# Altium PCB PCB1.PcbDoc
Units mm, origin at the board's own origin, x right, y up, seen from the top; angles counter-clockwise.
Board outline 45 x 31 mm, 2 copper layers (Top Layer, Bottom Layer); 47 components, 32 nets, 208 pads, 24 vias.
Unrouted connection lines stored in the file: 16.
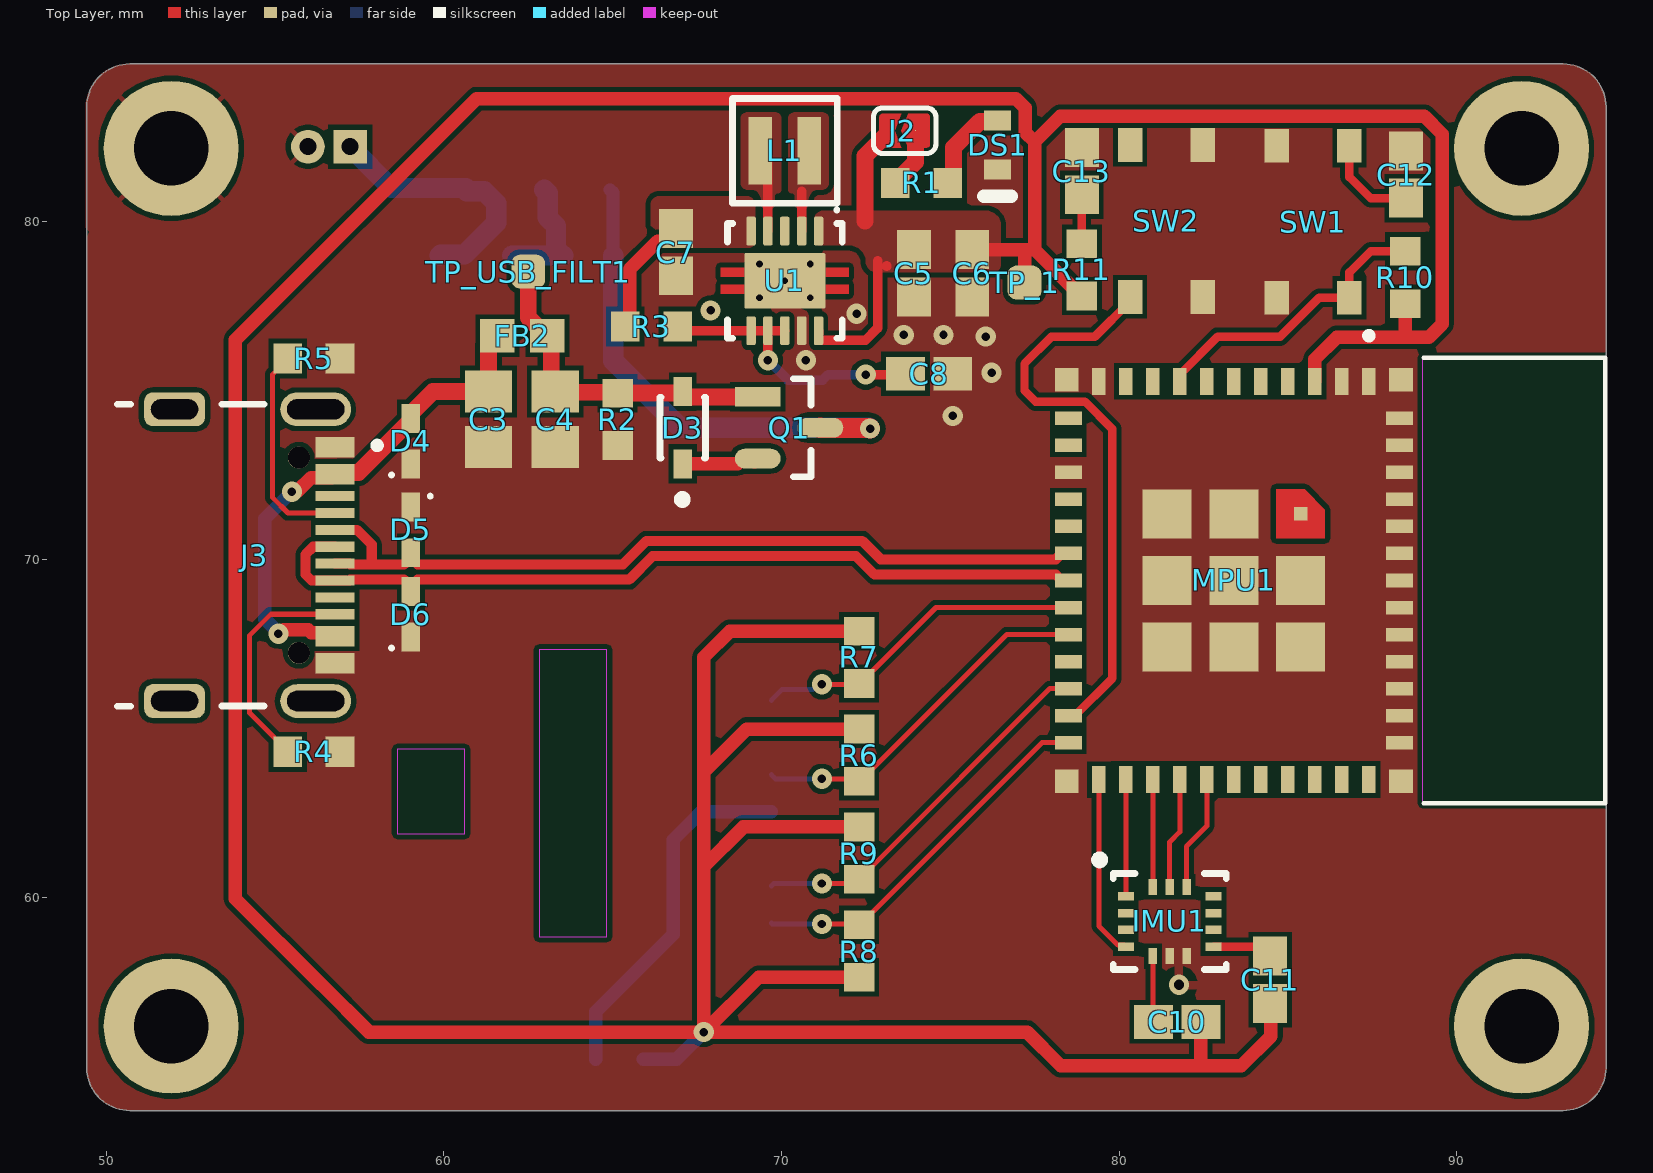
[diagram p0: Top Layer view]
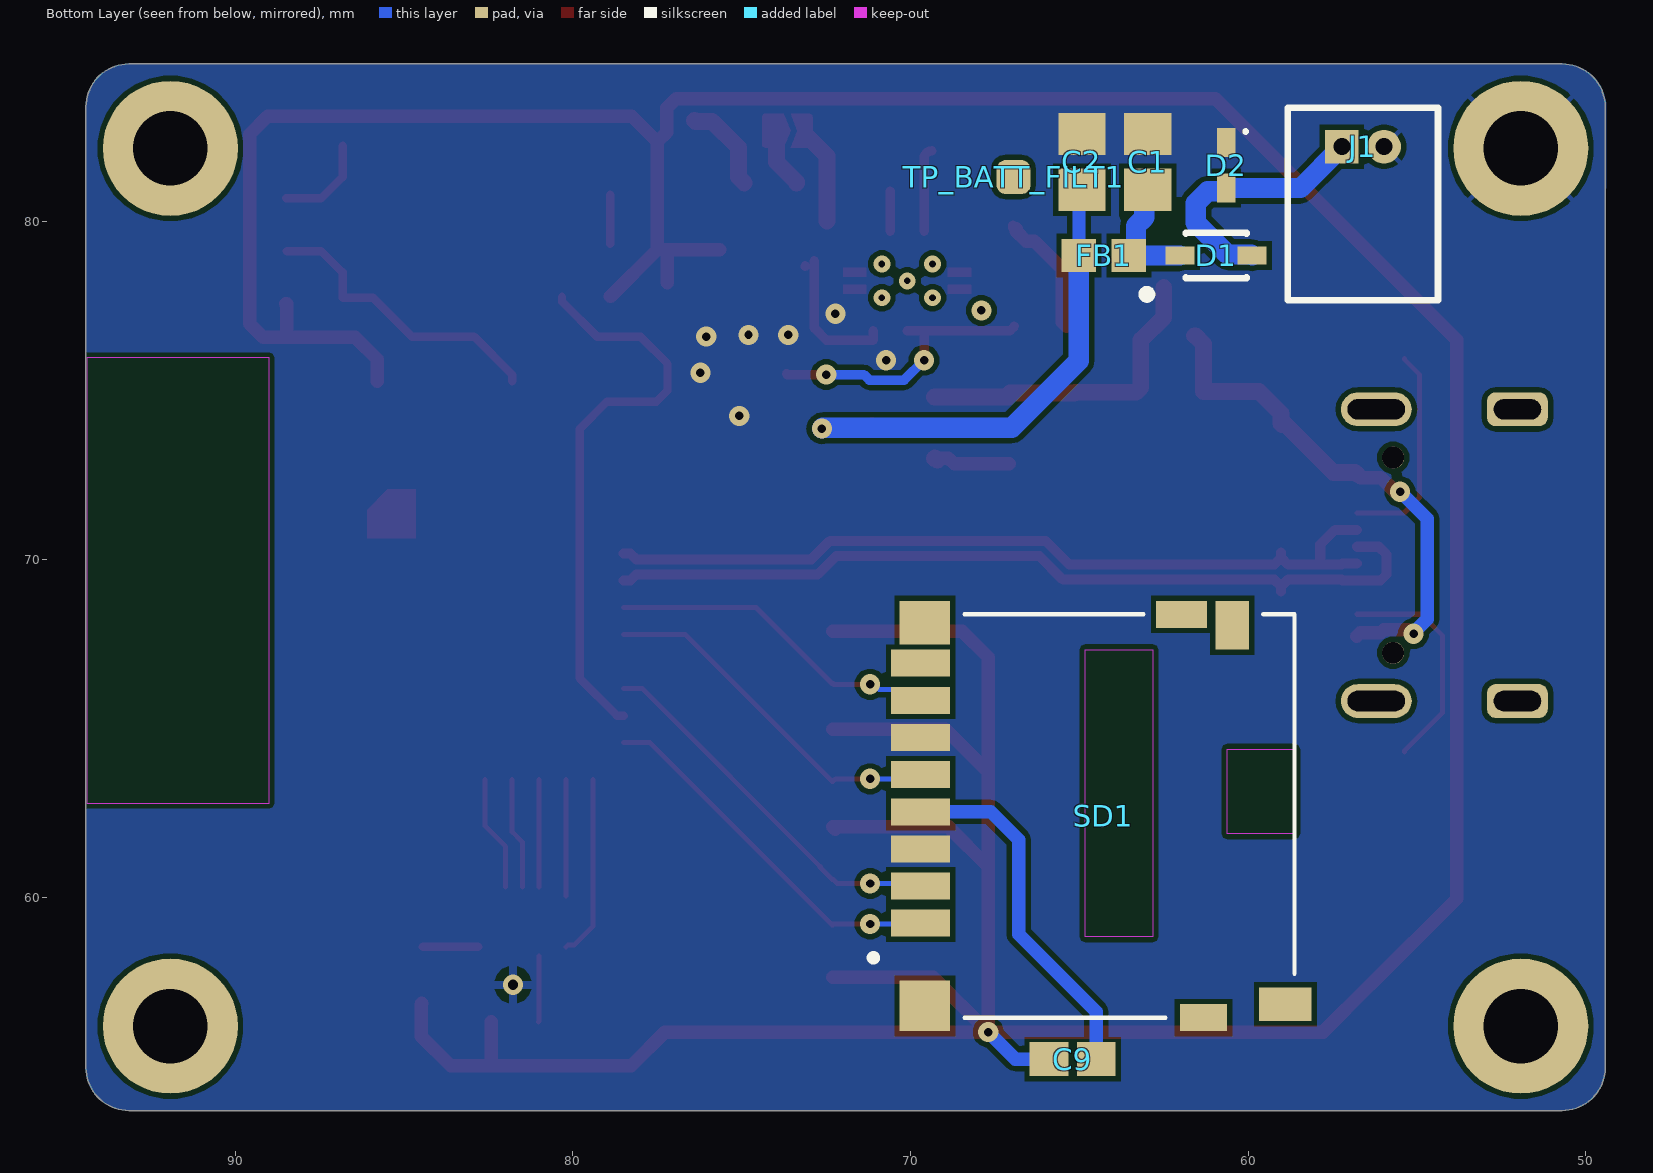
[diagram p1: Bottom Layer view, seen from below]
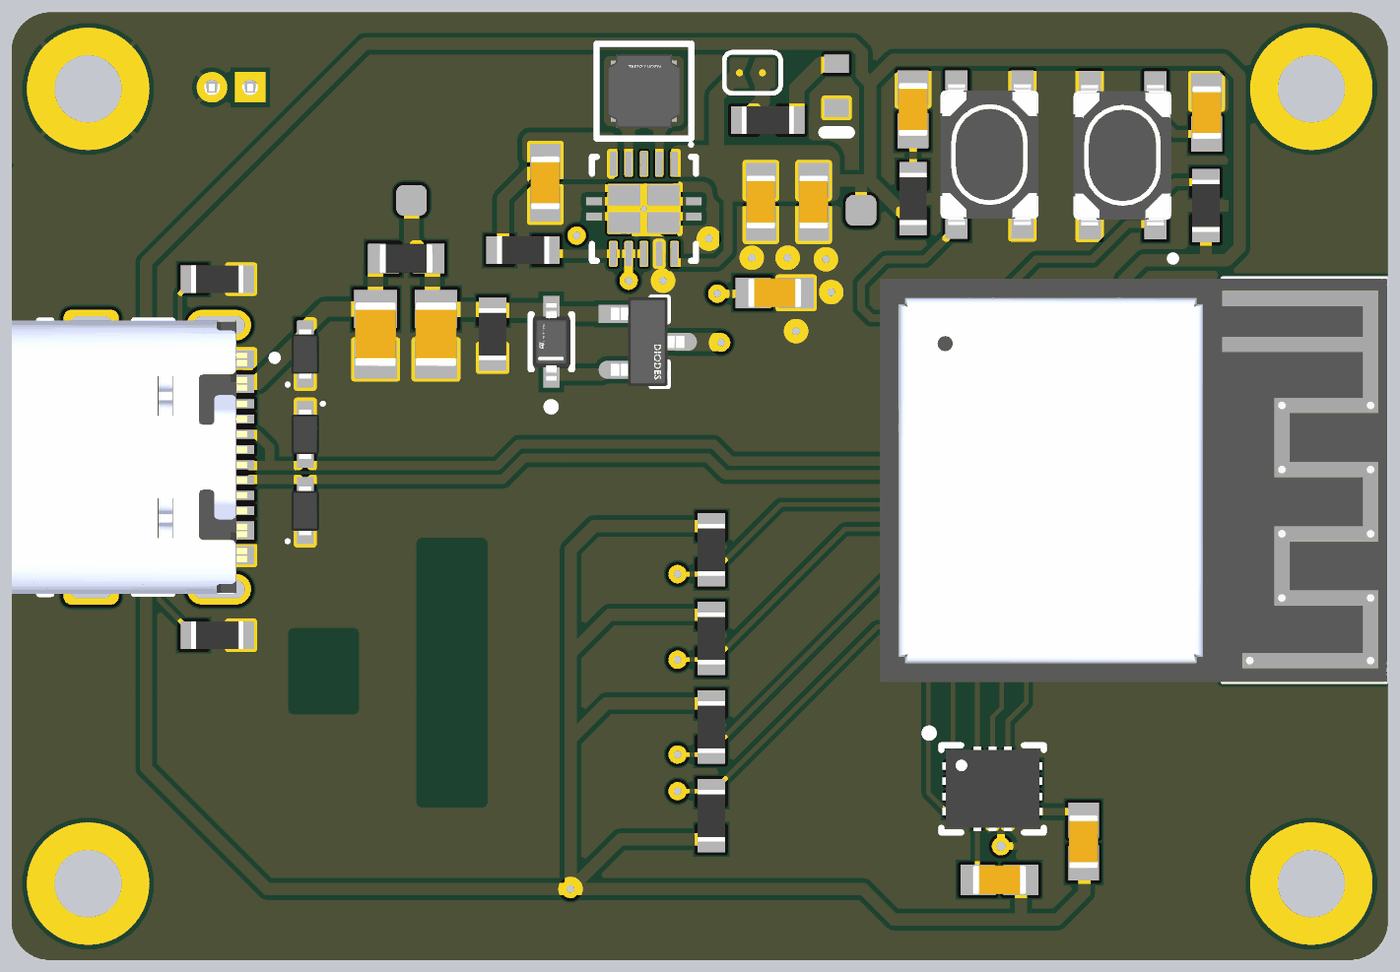
[diagram p2: 3D render of the assembled board from above, using the file's embedded part models]
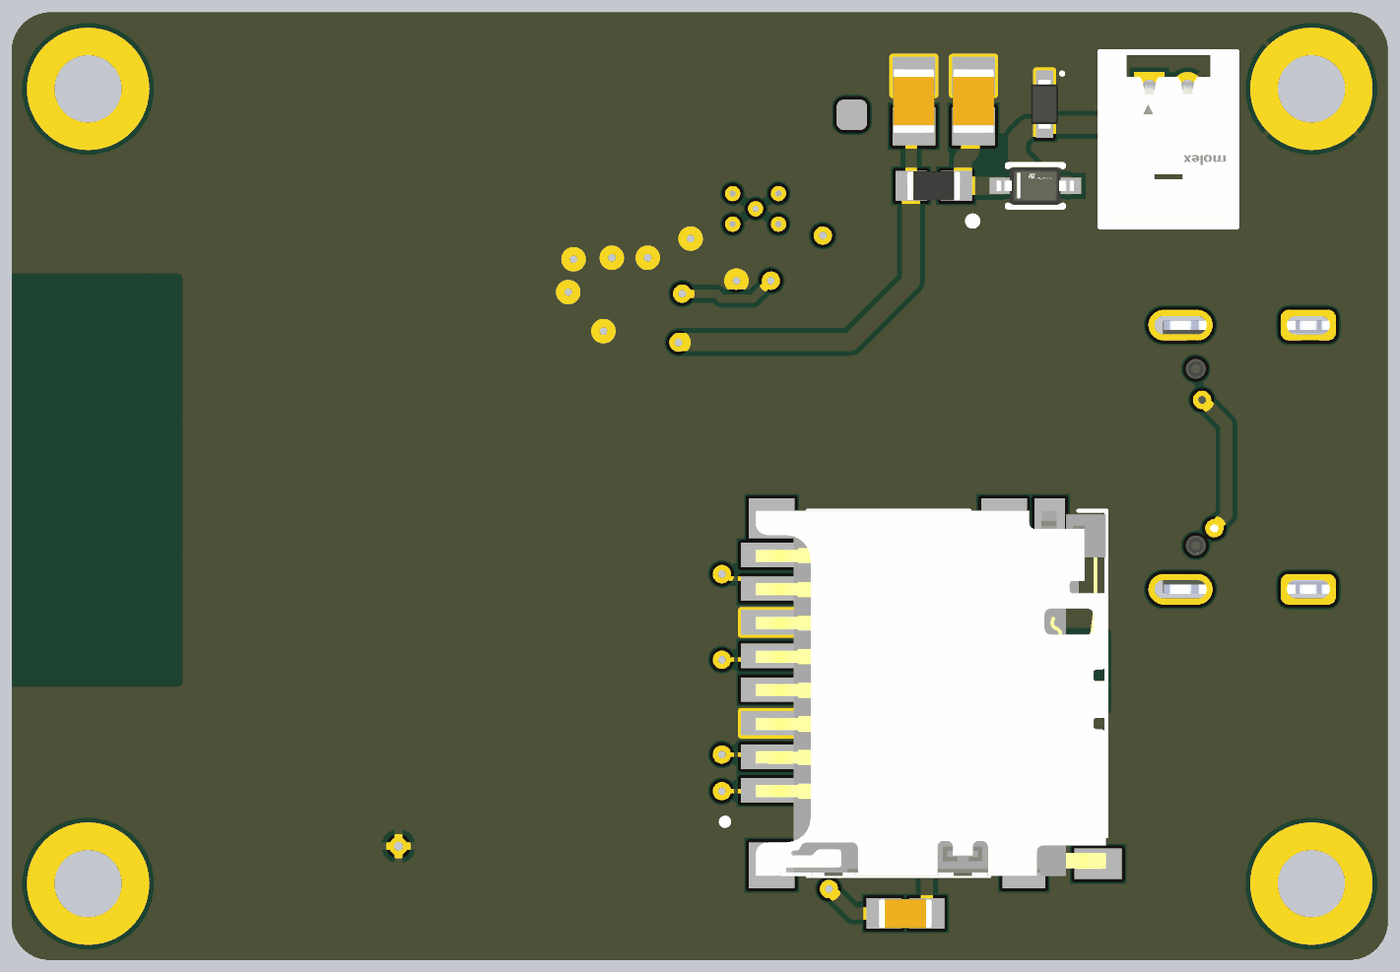
[diagram p3: 3D render of the assembled board from below, using the file's embedded part models]

## Layer stack, top to bottom
Top Solder: solder mask 0.0102, Solder Resist, Dk 3.5
Top Layer: signal copper 0.0356
Dielectric 1: dielectric 0.32, FR-4, Dk 4.6
Bottom Layer: signal copper 0.0356
Bottom Solder: solder mask 0.0102, Solder Resist, Dk 3.5

## Board outline
50.695,53.675 cw(c50.695,54.945) 49.425,54.945 49.425,83.405 cw(c50.695,83.405) 50.695,84.675 93.155,84.675 cw(c93.155,83.405) 94.425,83.405 94.425,54.95 94.425,54.945 cw(c93.155,54.945) 93.155,53.675

## Design rules (kind name [scope] priority, off if disabled: settings)
Clearance [All] p1: gap=0.15 ignorepadtopadclearanceinfootprint=FALSE
DiffPairsRouting [All] p1: maxlimit=2 minlimit=0.15 mostfreqgap=0.15 toplayer_minwidth=0.15 toplayer_maxwidth=1 toplayer_prefwidth=0.3 bottomlayer_minwidth=0.15 bottomlayer_maxwidth=1 bottomlayer_prefwidth=0.3 maxuncoupledlength=12.7
MinimumSolderMaskSliver [All] p1: minsoldermaskwidth=0.15
PolygonConnect [All] p1: thpad.connectstyle=Relief thpad.reliefconductorwidth=0.15 thpad.reliefentries=4 thpad.polygonreliefangle="45 Angle" thpad.airgapwidth=0.15 smdpad.connectstyle=Direct smdpad.reliefconductorwidth=0.15 smdpad.reliefentries=4 smdpad.polygonreliefangle="45 Angle" smdpad.airgapwidth=0.15 via.connectstyle=Direct via.reliefconductorwidth=0.254 via.reliefentries=4 via.polygonreliefangle="90 Angle" via.airgapwidth=0.254
RoutingVias [All] p1: holewidth=0.3 width=0.7 viastyle="Through Hole" minholewidth=0.25 minwidth=0.6 maxholewidth=0.3 maxwidth=0.7
SolderMaskExpansion [All] p1: expansion=0.102 istentingtop=FALSE
SupplyNets "Schematic Supply Nets_4" [InNet('+3V3')] p1: voltage=0.000
SupplyNets "Schematic Supply Nets_5" [InNet('V_USB')] p2: voltage=0.000
SupplyNets "Schematic Supply Nets_3" [InNet('V_BATT_FILT')] p3: voltage=0.000
SupplyNets "Schematic Supply Nets_2" [InNet('V_USB_FILT')] p4: voltage=0.000
SupplyNets "Schematic Supply Nets_1" [InNet('V_BATT')] p5: voltage=0.000
SupplyNets "Schematic Supply Nets" [InNet('GND')] p6: voltage=0.000
Width [All] p1: maxlimit=1 minlimit=0.15 preferedwidth=0.3
28 further rules are at their usual default settings.

## Classes and differential pairs
component class U_2_ESP_batt_shield-MCU_and_sensors: C9 C10 C11 C12 C13 IMU1 MPU1 R6 R7 R8 R9 R10 R11 SD1 SW1 SW2
component class U_1_ESP_batt_shield-Power: C1 C2 C3 C4 C5 C6 C7 C8 D1 D2 D3 D4 D5 D6 DS1 FB1 FB2 J1 J2 J3 L1 Q1 R1 R2 R3 R4 R5 TP_1 TP_BATT_FILT1 TP_USB_FILT1 U1
differential pair USB_D: +USB_D_P -USB_D_N

## Components (designator, comment, footprint, x,y, rotation, side; value= is the part's Value field where it differs from the comment)
C1 "2u2" CAP_0805 62.975,81.775 r270 bottom
C2 "2u2" CAP_0805 64.925,81.775 r270 bottom
C3 "2u2" CAP_0805 61.325,74.15 r90 top
C4 "2u2" CAP_0805 63.3,74.15 r90 top
C5 "CAP_0603" CAP_0603 73.925,78.475 r90 top
C6 "CAP_0603" CAP_0603 75.65,78.475 r90 top
C7 "CAP_0603" CAP_0603 66.875,79.1 r90 top
C8 "CAP_0603" CAP_0603 74.375,75.5 r180 top
C9 "100n" CAP_0603 65.2,55.2 r0 bottom
C10 "100n" CAP_0603 81.725,56.3 r0 top
C11 "100n" CAP_0603 84.475,57.55 r270 top
C12 "0.1uF" CAP_0603 88.5,81.4 r270 top
C13 "0.1uF" CAP_0603 78.9,81.5 r270 top
D1 "BAT20JFILM" FP-BAT20JFILM-MFG 60.95,79 r180 bottom
D2 "TWS_LESD5D5.0CT1G" SOD-523 60.65,81.675 r270 bottom
D3 "BAT20JFILM" FP-BAT20JFILM-MFG 67.075,73.9 r90 top
D4 "TWS_LESD5D5.0CT1G" SOD-523 59.025,73.5 r90 top
D5 "TWS_LESD5D5.0CT1G" SOD-523 59.025,70.875 r270 top
D6 "TWS_LESD5D5.0CT1G" SOD-523 59.025,68.375 r90 top
DS1 "TLMS1100-GS08" VISH-TLMX1100_V 76.4,82.275 r270 top
FB1 "120R" FB_0603 64.275,79 r0 bottom
FB2 "120R" FB_0603 62.325,76.625 r0 top
IMU1 "BMI270" LGA14_3X2.5X0.8MM 81.5,59.275 r0 top
J1 "53048-0210" FP-53048-0210-MFG 56.6,80.525 r180 bottom
J2 "JUMPER_BRIDGED" JUMPER_SOLDER_ 73.6,82.7 r180 top
J3 "USB4105-GF-A-060" GCT_USB4105-GF-A-060 52.025,70.125 r270 top
L1 "NRH2412T100MNGH" FP-NRH2412-MFG 70.1,82.1 r0 top
MPU1 "ESP32-C6-mini" ESP32C6_MINI 83.4,69.375 r270 top
Q1 "DMG2305UX-7" FP-SOT23-IPC_B 70.225,73.9 r0 top
R1 "RES_0603" RES_0603 74.15,81.15 r180 top
R2 "RES_0603" RES_0603 65.15,74.15 r90 top
R3 "RES_0603" RES_0603 66.15,76.9 r180 top
R4 "5k1" RES_0603 56.15,64.3 r180 top
R5 "5k1" RES_0603 56.15,75.95 r180 top
R6 "10k" RES_0603 72.3,64.2 r90 top
R7 "10k" RES_0603 72.3,67.1 r90 top
R8 "10k" RES_0603 72.3,58.4 r270 top
R9 "10k" RES_0603 72.3,61.3 r90 top
R10 "100k" RES_0603 88.475,78.35 r270 top
R11 "100k" RES_0603 78.9,78.575 r270 top
SD1 "SD_CARD_DM3D-SF" SD_DM3D-SF 64.3,62.4 r270 bottom
SW1 "SW_PTS815SJK250SMTR" PTS815SJK250SMTR 85.75,80 r270 top
SW2 "SW_PTS815SJK250SMTR" PTS815SJK250SMTR 81.4,80.025 r90 top
TP_1 "stPoint" TEST_POINT_ROUND_REC 77.2,78.2 r90 top
TP_BATT_FILT1 "TestPoint" TEST_POINT_ROUND_REC 66.95,81.325 r90 bottom
TP_USB_FILT1 "TestPoint" TEST_POINT_ROUND_REC 62.5,78.525 r90 top
U1 "TPS63000DRCR" DRC0010J_V 70.1,78.25 r270 top

## Footprints (in the part's own frame and the unit in brackets; to place one, negate y for a bottom-side part, rotate by r counter-clockwise, add the part's x,y. Pads: shape width x height; smd on the part's side, far side on the other; paste and mask are expansions set on the pad)
CAP_0603 [mm]
  rect 1.15x1 smd: 1(-0.7,0) 2(0.7,0)
  body extent -0.87,-0.48 0.87,0.48, height 1
CAP_0805 [mm] "Capacitor SMD 0805"
  rect 1.25x1.4 smd: 1(-0.825,0) 2(0.825,0)
  body extent -1.05,-0.67 1.05,0.67, height 1.27
DRC0010J_V [mm] "SON, 10-Leads, Body 3x3mm, Pitch 0.5mm, Thermal Pad 2.4x1.65mm, TI Recommended"
  rrect36% 0.85x0.28 smd paste-0.025 mask+0.07: 1(-1.475,1) 2(-1.475,0.5) 3(-1.475,0) 4(-1.475,-0.5) 5(-1.475,-1) 6(1.475,-1) 7(1.475,-0.5) 8(1.475,0) 9(1.475,0.5) 10(1.475,1)
  rrect6% 1.65x2.4 smd paste-0.825 mask+0.07: 11(0,0)
  Top Layer region: -0.39,1.2 -0.11,1.2 -0.11,1.9 -0.39,1.9
  Top Layer region: 0.39,1.9 0.11,1.9 0.11,1.2 0.39,1.2
  Top Layer region: 0.39,-1.2 0.11,-1.2 0.11,-1.9 0.39,-1.9
  Top Layer region: -0.39,-1.9 -0.11,-1.9 -0.11,-1.2 -0.39,-1.2
  silkscreen extent -2.15,-1.7 1.7,1.7, body extent -1.55,-1.55 1.55,1.55, height 1
ESP32C6_MINI [mm] "Footprint for ESP32-C6-mini module"
  rect 0.8x0.4 smd: 1(-5.9,4) 2(-5.9,3.2) 3(-5.9,2.4) 4(-5.9,1.6) 5(-5.9,0.8) 6(-5.9,0) 7(-5.9,-0.8) 8(-5.9,-1.6) 9(-5.9,-2.4) 10(-5.9,-3.2) 11(-5.9,-4) 25(5.9,-4) 26(5.9,-3.2) 27(5.9,-2.4) 28(5.9,-1.6) 29(5.9,-0.8) 30(5.9,0) 31(5.9,0.8) 32(5.9,1.6) 33(5.9,2.4) 34(5.9,3.2) 35(5.9,4)
  rect 0.4x0.8 smd: 12(-4.8,-4.9) 13(-4,-4.9) 14(-3.2,-4.9) 15(-2.4,-4.9) 16(-1.6,-4.9) 17(-0.8,-4.9) 18(0,-4.9) 19(0.8,-4.9) 20(1.6,-4.9) 21(2.4,-4.9) 22(3.2,-4.9) 23(4,-4.9) 24(4.8,-4.9) 36(4.8,4.9) 37(4,4.9) 38(3.2,4.9) 39(2.4,4.9) 40(1.6,4.9) 41(0.8,4.9) 42(0,4.9) 43(-0.8,4.9) 44(-1.6,4.9) 45(-2.4,4.9) 46(-3.2,4.9) 47(-4,4.9) 48(-4.8,4.9)
  rect 0.4x0.4 smd paste-1 mask+0: 49(-1.975,1.975)
  rect 1.45x1.45 smd paste-1 mask+0: 49(-1.975,0)
  rect 1.45x1.45 smd: 49(-1.975,-1.975) 49(0,1.975) 49(0,0) 49(0,-1.975) 49(1.975,1.975) 49(1.975,0) 49(1.975,-1.975)
  rect 0.7x0.7 smd: 50(5.95,4.95) 51(5.95,-4.95) 52(-5.95,-4.95) 53(-5.95,4.95)
  Top Layer region: -1.25,1.25 -2.7,1.25 -2.7,2.1 -2.1,2.7 -1.25,2.7
  Keep-Out Layer region: 6.6,5.6 -6.6,5.6 -6.6,11 6.6,11
  silkscreen extent -7.35,3.9 6.6,11, body extent -6.59,-5.59 6.61,11.01, height 2.55
FB_0603 [mm] "Chip Inductor, 2-Leads, Body 1.60x0.80mm, IPC Medium Density"
  rect 1.02x0.98 smd: 1(-0.74,0) 2(0.74,0)
  body extent -0.87,-0.48 0.87,0.48, height 0.8
FP-53048-0210-MFG [mm]
  rect 1x1 hole 0.5 paste-2539.97 mask+0: 1(-0.625,1.7)
  round 1 hole 0.5 paste-2539.97 mask+0: 2(0.625,1.7)
  silkscreen extent -2.23,-2.85 2.23,2.85, body extent -2.12,-2.75 2.12,2.75, height 3.7
FP-BAT20JFILM-MFG [mm]
  rect 0.86x0.54 smd paste+0 mask+0: 1(-1.07,0) 2(1.07,0)
  silkscreen extent -2.17,-1.27 0.9,0.68, body extent -1.26,-0.62 1.26,0.62, height 1.13
FP-NRH2412-MFG [mm]
  rect 0.7x2 smd paste+0 mask+0: 1(-0.725,0) 2(0.725,0)
  silkscreen extent -1.55,-1.55 1.55,1.55, body extent -1.35,-1.35 1.35,1.35, height 0.25
FP-SOT23-IPC_B [mm]
  rect 1.359x0.587 smd paste+0 mask+0: 1(-0.927,0.915)
  rrect100% 1.359x0.587 smd paste+0 mask+0: 2(-0.927,-0.915) 3(0.927,0)
  silkscreen extent 0.13,-1.45 0.65,1.45, body extent -1.86,-1.7 1.86,1.7, height 0.25
GCT_USB4105-GF-A-060 [mm]
  rect 0.6x1.15 smd: A1_B12(-3.2,4.755) A4_B9(-2.4,4.755) B1_A12(3.2,4.755) B4_A9(2.4,4.755)
  rect 0.3x1.15 smd: A5(-1.25,4.755) A6(-0.25,4.755) A7(0.25,4.755) A8(1.25,4.755) B5(1.75,4.755) B6(0.75,4.755) B7(-0.75,4.755) B8(-1.75,4.755)
  oval 1x2.1 hole 0.6 slot 1.7 at 90 deg: SH(-4.32,4.18) SH(4.32,4.18)
  rrect50% 1x1.8 hole 0.6 slot 1.4 at 90 deg: SH(-4.32,0) SH(4.32,0)
  round 0.65 hole 0.65 unplated: ""(-2.89,3.68) ""(2.89,3.68)
  silkscreen extent -4.47,-1.7 4.47,6.1, body extent -4.47,-2.6 4.47,5.11, height 3.31
JUMPER_SOLDER_ [mil]
  round 1 smd: 1(-14.76,0) 2(14.76,0)
  Top Layer region: -31.5,15.72 -31.21,17.24 -30.35,18.52 -29.07,19.38 -27.56,19.68 -27.56,19.68 -5.91,19.68 1.97,0 -5.91,-19.68 -27.56,-19.68 -29.07,-19.39 -30.34,-18.53 -31.2,-17.25 -31.5,-15.75 -31.5,-15.75
  Top Layer region: 27.56,15.75 27.26,17.25 26.41,18.53 25.13,19.38 23.62,19.68 23.62,19.68 1.97,19.68 9.84,0 1.97,-19.68 23.62,-19.68 25.59,-19.16 27.03,-17.72 27.56,-15.75 27.56,-15.75
  silkscreen extent -38,-27 34,27
LGA14_3X2.5X0.8MM [mm] "LGA, 14-Leads, Body 3.00x2.50mm, Pitch 0.50mm, Thermal Pad 0.10x0.10mm, IPC Medium Density"
  rect 0.475x0.25 smd mask+0.102: 1(-1.3,0.75)
  rect 0.475x0.25 smd: 2(-1.3,0.25) 3(-1.3,-0.25) 4(-1.3,-0.75) 8(1.3,-0.75) 9(1.3,-0.25) 10(1.3,0.25) 11(1.3,0.75)
  rect 0.25x0.475 smd: 5(-0.5,-1.025) 6(0,-1.025) 7(0.5,-1.025) 12(0.5,1.025) 13(0,1.025) 14(-0.5,1.025)
  silkscreen extent -2.2,-1.43 1.68,1.95, body extent -1.64,-1.39 1.64,1.39, height 0.87
PTS815SJK250SMTR [mm] "This is layout for tactile switch PTS815 SMT G Type"
  rect 1x0.725 smd: 1(-2.25,1.075) 2(2.25,1.075) 3(-2.25,-1.075) 4(2.25,-1.075)
  body extent -2.3,-1.6 2.3,1.6, height 2.5
RES_0603 [mm] "Chip Resistor, 2-Leads, Body 1.60x0.80mm, IPC Medium Density"
  rect 0.85x0.9 smd: 1(-0.775,0) 2(0.775,0)
  body extent -0.85,-0.45 0.85,0.45, height 0.55
SD_DM3D-SF [mm]
  rect 0.8x1.75 smd: 1(3.175,-5.4) 2(2.075,-5.4) 3(0.975,-5.4) 4(-0.125,-5.4) 5(-1.225,-5.4) 6(-2.325,-5.4) 7(-3.425,-5.4) 8(-4.525,-5.4)
  rect 1.3x1.5 smd: S1(-5.725,-5.275)
  rect 1.5x1.5 smd: S2(5.625,-5.275)
  rect 0.8x1.5 smd: S3(-5.975,2.325)
  rect 0.8x1.4 smd: S4(5.975,2.975)
  rect 1x1.55 smd: SW-A(5.575,5.4)
  rect 1.45x1 smd: SW-B(-5.65,3.825)
  Keep-Out Layer region: 0.525,3.675 -1.975,3.675 -1.975,5.675 0.525,5.675
  Keep-Out Layer region: 3.575,-0.525 -4.925,-0.525 -4.925,1.475 3.575,1.475
  Keep-Out Layer region: 3.575,-0.525 -4.925,-0.525 -4.925,1.475 3.575,1.475
  Keep-Out Layer region: 0.525,3.675 -1.975,3.675 -1.975,5.675 0.525,5.675
  silkscreen extent -5.97,-6.9 5.98,5.67, body extent -5.97,-5.8 5.98,5.65, height 1.55
SOD-523 [mm] "SODFL, 2-Leads, Body 0.80x1.60mm, IPC Medium Density"
  rect 0.85x0.55 smd: 1(-0.675,0) 2(0.675,0)
  silkscreen extent -1.05,0.53 -0.95,0.62, body extent -0.8,-0.45 0.8,0.45, height 0.7
TEST_POINT_ROUND_REC [mm]
  rrect50% 1x1 smd: 1(0,0)
VISH-TLMX1100_V [mm] "SMD, 2-Leads, Body 1.6x0.8mm"
  rect 0.6x0.8 smd: 1(-0.725,0) 2(0.725,0)
  silkscreen extent 1.52,-0.4 1.52,0.4, body extent -0.8,-0.4 0.8,0.4, height 0.65

## Part data
C1 C2 C3 C4: library part CAP_0805
C9 C10 C11 C12 C13: library part CAP_0603
D1 D3: library part CMP-12187-000030-1, "DIODE SCHOTTKY 23V 1A SOD323", Average Rectified Current=1A, Capacitance=30pF, Forward Voltage=620mV, Max Forward Surge Current (Ifsm)=5A, Max Operating Temperature=150°C, Max Repetitive Reverse Voltage (Vrrm)=23V, Max Reverse Leakage Current=12uA, Min Operating Temperature=-65°C, Package Quantity=1, Current Rating=1A, Element Configuration=Single, Forward Current=1A, Height=1.03mm, Lead Free="Lead Free", Length=1.8mm, Max Reverse Voltage (DC)=23V, Max Surge Current=5A, Mount="Surface Mount", Number of Pins=2, Output Current=1A, Packaging="Tape and Reel", Peak Non-Repetitive Surge Current=5A, Peak Reverse Current=12uA, Polarity=Standard, Radiation Hardening=No, REACH SVHC="No SVHC", Voltage Rating (DC)=23V, Weight=0.01lb, Width=1.35mm
DS1: library part CMP-1666-00027-1, "LED, RED, 2.1 V, -40 to 100 degC, 2-Pin SMD (0603), RoHS, Tape and Reel", Capacitance="12 pF", Case Code (Imperial)=0603, Case Code (Metric)=1608, Max Operating Temperature=125degC, Min Operating Temperature=-55degC, Package Quantity=4000, Resistance="100000000000 Ohm", Tolerance=5%, Type (Capacitors)=C0G, Voltage Rating="50 V", Case/Package=0603, ComponentLink1Description="Manufacturer URL", ComponentLink1URL=http://www.vishay.com/, ComponentLink2Description=Datasheet, ComponentLink2URL=http://www.vishay.com/docs/83173/tlmb1100.pdf, DatasheetVersion="Rev. 2.7, 03/2016", Height="0.8 mm", Length="1.6 mm", Mount="Surface Mount", PackageDescription="2-Pin Surface Mount Device, Body 1.6 x 0.8 mm", PackageReference=TLMX1100, Packaging="Tape and Reel", Pins=2, Radiation Hardening=No, REACH SVHC="No SVHC", RoHSCompliant=True, Voltage Rating (DC)="50 V", Width="0.8 mm"
FB1 FB2: library part BLM18AG121SN1D, "Murata BLM18AG121SN1D"
J1: library part CMP-04776-000546-1, "CONN HEADER R/A 2POS 1.25MM", Color=Natural, Contact Resistance=20mR, Current Rating=1A, Flammability Rating="UL94 V-0", Insulation Resistance=100MR, Max Operating Temperature=85°C, Min Operating Temperature=-40°C, Package Quantity=5000, Voltage Rating=125V, Contact Material=Bronze, Contact Plating=Tin, Gender=Male, Glow Wire Compliant=Non-compliant, Housing Color=Natural, Housing Material=Nylon, Lead Free="Lead Free", Mount="Through Hole", Number of Circuits=2, Number of Contacts=2, Number of Positions=2, Number of Rows=1, Orientation="Right Angle", Packaging=Tray, Pitch=1.25mm, Radiation Hardening=No, RoHS Compliant=Yes, Series=PicoBlade, Termination="Through Hole", Voltage Rating (DC)=125V
J3: "This is 16pin USB-C connector"
L1: library part CMP-14484-000582-1, "Shielded Wirewound Inductor 10uH 20% 0.51A 0.72Ω SMD", Case/Package=Nonstandard, Current Rating=450mA, DC Resistance (DCR)=600mR, Inductance=10uH, Max DC Current=810mA, Max Operating Temperature=120°C, Min Operating Temperature=-25°C, Package Quantity=2500, Self Resonant Frequency=29MHz, Test Frequency=100kHz, Tolerance=20%, Core Material=Ferrite, Halogen Free="Halogen Free", Height=1.2mm, Height - Seated (Max)=0.047inch, Length=0.095inch, Mount="Surface Mount", Packaging="Tape and Reel", RoHS Compliant=Yes, Saturation Current=810mA, Shielding=Shielded, Termination=SMD/SMT, Width=0.095inch
Q1: library part CMP-1693-00002-4, "MOSFET P-CH 20V 4.2A SOT23", Case/Package=SOT-23, Continuous Drain Current (ID)=4.2A, Drain to Source Resistance=200mR, Drain to Source Voltage (Vdss)=20V, Gate to Source Voltage (Vgs)=8V, Input Capacitance=808pF, Max Operating Temperature=150°C, Max Power Dissipation=1.4W, Min Operating Temperature=-55°C, On-State Resistance=52MR, Package Quantity=3000, Threshold Voltage=-900mV, Contact Plating=Tin, Element Configuration=Single, Fall Time=34.7ns, Height=1.1mm, Lead Free="Lead Free", Length=3mm, Mount="Surface Mount", Number of Channels=1, Number of Pins=3, Packaging="Tape and Reel", Radiation Hardening=No, Rds On Max=52mR, REACH SVHC="No SVHC", Rise Time=13.7ns, Turn-Off Delay Time=79.3ns, Turn-On Delay Time=10.8ns, Weight=0.000282oz, Width=1.4mm
R4 R5 R6 R7 R8 R9 R10 R11: library part RES_0603
TP_1: library part TestPoint
U1: library part CMP-0345-00001-2, "Buck-Boost Voltage Converter with 1.8 to 5.5 V Input and 1.2 to 5.5 V Output, -40 to 85 degC, 10-Pin SON (DRC), Green (RoHS & no Sb/Br)", Dynamic Voltage Scaling=TRUE, Manufacturer="Texas Instruments", Switching Frequency(Max)(kHz)=1500, ComponentLink1Description=Datasheet, ComponentLink1URL=http://www.ti.com/general/docs/lit/getliterature.tsp?genericPartNumber=TPS63000&fileType=pdf, ComponentLink2Description="Package Specification", ComponentLink2URL=http://www.ti.com/litv/pdf/mpds117k, DatasheetVersion=SLVS520B, Eco-Plan="Green (RoHS & no Sb/Br)", Iout(Max)(A)=1.2, Iq(Typ)(mA)=0.04, Mounting Technology="Surface Mount", PackageDescription="10-Pin Plastic Small Outline No-Lead, 3 x 3 x 1 mm Body, 0.5 mm Pitch, Exposed Pad", PackageReference=DRC0010J, PackageVersion="revL, Sep-2011", PartNumber=TPS63000DRCR, Regulated Outputs(#)=1, SubFamily="Buck-Boost Regulator", Synchronous Rectification=TRUE, Topology=Buck-Boost, Vin(Max)(V)=5.5, Vin(Min)(V)=1.8, Vout(Max)(V)=5.5, Vout(Min)(V)=1.2
D2 D4 D5 D6: ComponentLink1Description=Datasheet:, ComponentLink1URL=https://jlcpcb.com/api/file/downloadByFileSystemAccessId/8588884026236657664
SD1: ComponentLink1Description="Mouser page:", ComponentLink1URL=https://eu.mouser.com/ProductDetail/Hirose-Connector/DM3D-SF?qs=nSryOFbzj8L3f0GFYlvXkw%3D%3D, ComponentLink2Description=Datasheet:, ComponentLink2URL=https://eu.mouser.com/datasheet/2/185/hiro_s_a0003496442_1-2269812.pdf

## Free pads (board coordinates)
  round 4 hole 2.2 paste-2539.97 mask+0: MH(51.925,82.175) MH1(91.925,82.175) MH2(91.925,56.175) MH3(51.925,56.175)

## Via types
v1: diameter 0.6, hole 0.25, Top Layer to Bottom Layer, 18 vias
v2: diameter 0.5, hole 0.2, Top Layer to Bottom Layer, 5 vias
v3: diameter 0.6, hole 0.3, Top Layer to Bottom Layer, 1 vias

## Nets (pads, with @x,y where several pads share a name; then routed paths per layer and width w, separated by ;. In a path a pad name is that pad's centre, name@x,y a point inside that pad or via, vN(x,y) a via of type N, cw(c..) or ccw(c..) an arc to the next point about the centre after c; other vN are vias at no path point)
+3V3: C5.2 C6.2 C9.2 C10.2 C11.2 J2.2 MPU1.3 R6.2 R7.2 R8.2 R9.2 R10.2 R11.2 TP_1.1 U1.1 U1.10 | length 152.3
  Top Layer w0.28: U1.10 71.1,76.49 72.49,76.49 72.85,76.85 72.85,78.85 ; 73.125,78.675 73.125,78.7
  Top Layer w0.4: R9.2@72.225,62 R9.2 68.875,62.075 67.7,60.9 ; R8.2 69.325,57.625 v1(67.7,56) ; R6.2 68.975,64.975 67.7,63.7 ; R7.2 68.475,67.875 67.7,67.1 67.7,63.7 ; C6.2 77.2,79.175 ; TP_1.1 77.2,79.175 ; R11.2 78.875,77.8 77.5,79.175 ; C10.2 82.425,55 ; C11.2 84.5,56.825 84.5,55.876 83.624,55 82.425,55 ; MPU1.3 85.8,75.925 86.45,76.575 88.525,76.575 ; R10.2@88.5,77.575 R10.2 88.475,76.625 88.525,76.575 ; v1(67.7,56) 67.7,60.9 ; v1(67.7,56) 57.783,56 56.4,57.383 56.392,57.383 53.825,59.95 53.825,76.5 60.975,83.65 76.945,83.65 77.222,83.372 77.222,82.647 77.5,82.37 ; v1(67.7,56) 72.3,56 77.275,56 78.275,55 82.425,55 ; 67.7,60.9 67.7,63.7 ; 77.2,79.175 77.5,79.175 ; 77.5,79.175 77.5,82.37 ; 77.5,82.37 78.255,83.125 89.045,83.125 89.575,82.595 89.575,76.975 89.175,76.575 88.525,76.575
  Top Layer w0.5: 72.475,80.025 72.475,81.95 73.05,82.525
  Bottom Layer w0.4: C9.2 66.9,55.2 v1(67.7,56)
BMI270_CS: IMU1.12 MPU1.29 | length 3.4
  Top Layer w0.15: IMU1.12 82,61.5 82.6,62.1 MPU1.29
BMI270_INT1: IMU1.4 MPU1.25 | length 5.4
  Top Layer w0.15: MPU1.25 79.4,59.144 79.969,58.575 80.15,58.575 IMU1.4
BMI270_MISO: IMU1.1 MPU1.26 | length 3.4
  Top Layer w0.15: IMU1.1 MPU1.26
BMI270_MOSI: IMU1.14 MPU1.27 | length 3.2
  Top Layer w0.15: IMU1.14 MPU1.27
BMI270_SCK: IMU1.13 MPU1.28 | length 3.3
  Top Layer w0.15: IMU1.13 81.5,61.631 81.8,61.931 MPU1.28
ESP_BOOT: C13.2 MPU1.23 R11.1 SW2.1 SW2.2 | length 18.5
  Top Layer w0.25: MPU1.23 78.7,65.375 79.8,66.475 79.8,73.864 78.989,74.675 77.525,74.675 77.2,75 77.2,75.8 77.994,76.594 79.282,76.594 80.325,77.637 SW2.1 ; R11.1 C13.2
ESP_EN: C12.2 MPU1.8 R10.1 SW1.1 SW1.2 | length 11.7
  Top Layer w0.25: MPU1.8 81.8,75.475 82.925,76.6 84.776,76.6 85.926,77.75 SW1.2 86.825,78.5 87.45,79.125 R10.1 ; SW1.1 86.825,81.325 87.45,80.7 C12.2
ESP_NC: MPU1.4 MPU1.7 MPU1.21 MPU1.32 MPU1.33 MPU1.34 MPU1.35
GND: C1.1 C2.1 C3.1 C4.1 C5.1 C6.1 C7.1 C8.1 C12.1 C13.1 D2.1 D4.1 D5.1 D6.1 DS1.2 IMU1.6 IMU1.7 J1.2 J3.A1_B12 J3.B1_A12 MPU1.1 MPU1.2 MPU1.11 MPU1.14 MPU1.36 MPU1.37 MPU1.38 MPU1.39 MPU1.40 MPU1.41 MPU1.42 MPU1.43 MPU1.44 MPU1.45 MPU1.46 MPU1.47 MPU1.48 MPU1.49 MPU1.50 MPU1.51 MPU1.52 MPU1.53 pad.MH R2.1 R4.1 R5.1 SD1.3 SD1.6 SW1.3 SW1.4 SW2.3 SW2.4 U1.3 U1.9 U1.11
  other v1: 75.075,74.25 76.225,75.525 70.725,75.9 76.05,76.6 73.625,76.65 74.8,76.65 72.225,77.275
  other v3: 81.775,57.4
NetC9_1: C9.1 SD1.4 | length 10.7
  Bottom Layer w0.4: C9.1 64.5,56.6 66.8,58.9 66.8,61.7 67.625,62.525 SD1.4
NetC10_1: C10.1 IMU1.5 | length 2
  Top Layer w0.15: IMU1.5 81,56.325 C10.1
NetC11_1: C11.1 IMU1.8 | length 1.6
  Top Layer w0.25: IMU1.8 C11.1@84.45,58.525
NetD1_2: D1.2 D2.2 J1.1 | length 7.7
  Bottom Layer w0.6: J1.1 58.45,81 D2.2 60.65,80.926 60.675,80.901 61.199,80.901 61.55,80.55 61.55,79.975 60.605,79.03 59.91,79.03 D1.2
NetDS1_1: DS1.1 R1.1 | length 2.8
  Top Layer w0.5: R1.1 75.1,81.325 75.1,82.2 75.875,82.975 76.375,82.975 DS1.1
NetJ2_1: J2.1 R1.2 | length 1.8
  Top Layer w0.5: R1.2 73.375,81.175 73.975,81.775 J2.1
NetJ3_A5: J3.A5 R5.2 | length 6.3
  Top Layer w0.15: R5.2 55.375,75.925 54.93,75.48 54.93,71.828 55.383,71.375 J3.A5
NetJ3_B5: J3.B5 R4.2 | length 6.7
  Top Layer w0.15: R4.2 55.375,64.325 54.25,65.45 54.25,67.75 54.875,68.375 J3.B5
NetL1_1: L1.1 U1.4 | length 2.5
  Top Layer w0.28: L1.1 cw(c69.375,81.875) 69.6,81.875 U1.4
NetL1_2: L1.2 U1.2 | length 1.2
  Top Layer w0.28: U1.2 70.6,80.9
SD_CS: MPU1.24 R8.1 SD1.1 | length 11.1
  Top Layer w0.15: v1(71.2,59.2) 72.275,59.2 R8.1 72.325,59.175 77.725,64.575 MPU1.24
  Bottom Layer w0.15: SD1.1 69.725,59.2 v1(71.2,59.2)
SD_MISO: MPU1.19 R7.1 SD1.7 | length 9.9
  Top Layer w0.15: v1(71.2,66.3) 72.275,66.3 R7.1 72.325,66.325 74.575,68.575 MPU1.19
  Bottom Layer w0.15: SD1.7 70.025,66.15 70.928,66.15 71.078,66.3 v1(71.2,66.3)
SD_MOSI: MPU1.22 R9.1 SD1.2 | length 11.2
  Top Layer w0.15: v1(71.2,60.4) 72.175,60.4 R9.1 72.325,60.525 72.675,60.875 72.675,60.9 77.95,66.175 MPU1.22
  Bottom Layer w0.15: SD1.2 69.775,60.4 v1(71.2,60.4)
SD_SCK: MPU1.20 R6.1 SD1.5 | length 10.7
  Top Layer w0.15: v1(71.2,63.5) 72.225,63.5 R6.1 72.325,63.425 76.675,67.775 MPU1.20
  Bottom Layer w0.15: SD1.5 69.825,63.5 v1(71.2,63.5)
TPS_VIN: C7.2 D3.1 Q1.2 R3.2 U1.5 | length 6.2
  Top Layer w0.28: C7.2@66.975,79.825 C7.2@66.975,79.9
  Top Layer w0.4: R3.2 65.5,77.025 65.5,78.595 66.33,79.425 66.575,79.425 66.875,79.725 C7.2 ; D3.1 68.707,72.83 68.877,73 Q1.2@69.283,73
  Top Layer w0.5: Q1.2@69.2,72.945 69.24,72.985 Q1.2 Q1.2@69.283,73
TPS_VINA: C8.2 R3.1 U1.6 U1.7 U1.8 | length 8.5
  Top Layer w0.28: R3.1 67.05,76.775 U1.6 U1.7 ; v1(69.6,75.9) 69.6,76.49 U1.7 ; U1.8 U1.7 ; v1(72.5,75.475) 73.65,75.475 C8.2
  Bottom Layer w0.28: v1(69.6,75.9) 70.19,75.31 71.219,75.31 71.384,75.475 v1(72.5,75.475)
USB_D_N: D5.2 J3.A7 J3.B7 MPU1.17 | length 24.5
  Top Layer w0.3: J3.A7 57.205,69.875 57.23,69.85 57.864,69.85 ; J3.B7 57.429,70.875 57.864,70.44 57.864,69.85 ; D5.2 D5.2@59.025,70.05 ; MPU1.17 78.3,70.175 78.125,70 72.94,70 72.39,70.55 66.003,70.55 65.303,69.85 59.225,69.85 D5.2@59.025,70.05 ; 57.864,69.85 58.825,69.85 D5.2@59.025,70.05
USB_D_P: D6.2 J3.A6 J3.B6 MPU1.18 | length 25.2
  Top Layer w0.3: J3.A6 56.131,70.375 55.905,70.149 55.905,69.551 56.081,69.375 57.205,69.375 57.23,69.4 57.677,69.4 58.825,69.4 D6.2@59.025,69.2 ; D6.2 D6.2@59.025,69.2 ; MPU1.18 78.3,69.375 78.125,69.55 72.753,69.55 72.203,70.1 66.189,70.1 65.489,69.4 59.225,69.4 D6.2@59.025,69.2
V_BATT: C1.2 D1.1 FB1.1 | length 3.7
  Bottom Layer w0.6: D1.1 FB1.1 63.515,79 63.325,79.19 63.325,79.875 63.075,80.125 63.075,80.85 C1.2
V_BATT_FILT: C2.2 FB1.2 Q1.3 TP_BATT_FILT1.1 | length 15
  Top Layer w0.6: Q1.3 71.158,73.893 72.607,73.893 v1(72.625,73.875)
  Bottom Layer w0.381: C2.2 65.015,80.86 FB1.2
  Bottom Layer w0.6: FB1.2 65.015,75.885 67,73.9 72.6,73.9 v1(72.625,73.875)
V_USB: C3.2 D4.2 FB2.1 J3.A4_B9 J3.B4_A9 | length 15.5
  Top Layer w0.4: v1(55.1,67.8) 55.154,67.8 55.264,67.91 55.985,67.91 56.07,67.825 56.68,67.825 J3.B4_A9 ; v1(55.5,72) 55.538,72.038 55.683,72.038 56.07,72.425 56.68,72.425 J3.A4_B9
  Top Layer w0.5: J3.A4_B9 56.83,72.575 57.471,72.575 58.896,74 59,74 59.025,74.025 D4.2 59.025,74.325 59.675,74.975 C3.2 61.325,76.385 61.565,76.625 FB2.1
  Bottom Layer w0.4: v1(55.1,67.8) 55.1,67.834 54.7,68.234 54.7,71.2 v1(55.5,72)
V_USB_FILT: C4.2 D3.2 FB2.2 Q1.1 R2.2 TP_USB_FILT1.1 | length 9.5
  Top Layer w0.5: TP_USB_FILT1.1@62.5,78.05 62.5,77.17 63.163,76.507 63.182,76.507 63.182,75.093 C4.2 63.325,74.95 65.125,74.95 R2.2 67.055,74.925 67.055,74.855 67.095,74.815 Q1.1
pads on no net: IMU1.2 IMU1.3 IMU1.9 IMU1.10 IMU1.11 J3. J3.A8 J3.B8 J3.SH MPU1.5 MPU1.6 MPU1.9 MPU1.10 MPU1.12 MPU1.13 MPU1.15 MPU1.16 MPU1.30 MPU1.31 SD1.8 SD1.S1 SD1.S2 SD1.S3 SD1.S4 SD1.SW-A SD1.SW-B
copper on no net:
  other v1: 67.9,77.375
  other v2: 69.35,77.75 70.85,77.75 70.1,78.25 69.35,78.75 70.85,78.75

## Polygon pours and split planes (outlines as drawn)
GND on Top Layer "GND_L01_P010" (solid, pour order 10): 49.4,79.6 49.4,83.38 cw(c50.695,83.38) 50.695,84.675 93.155,84.675 cw(c93.155,83.405) 94.425,83.405 94.425,54.945 cw(c93.155,54.945) 93.155,53.675 50.7,53.675 cw(c50.7,54.95) 49.425,54.95 49.425,79.625 cw(c49.5,79.625) 49.5,79.7
+3V3 on Top Layer "+3V3_L01_P009" (solid, pour order 9): 70.975,80.075 cw(c71.225,80.075) 71.225,80.325 76.05,80.325 cw(c76.05,79.875) 76.5,79.875 76.5,78.751 cw(c76.25,78.75) 76.25,78.5 72.825,78.5 cw(c72.825,78.825) 72.5,78.825 ccw(c72.025,78.825) 72.025,79.3 71.125,79.3 cw(c71.125,79.45) 70.975,79.45
TPS_VIN on Top Layer "TPS_VIN_L01_P008" (solid, pour order 8): 69.025,79.225 ccw(c69.025,79.425) 69.225,79.425 69.225,80.5 ccw(c68.975,80.5) 68.975,80.75 66.375,80.75 ccw(c66.375,80.5) 66.125,80.5 66.125,79.475 ccw(c66.375,79.475) 66.375,79.225
NetL1_1 on Top Layer "NETL1_1_L01_P004" (solid, pour order 4): 70,83.05 ccw(c69.8,83.05) 69.8,83.25 69,83.25 ccw(c69,83.05) 68.8,83.05 68.8,81.15 ccw(c69,81.15) 69,80.95 69.1,80.95 cw(c69.1,80.65) 69.4,80.65 69.4,80.55 ccw(c69.6,80.55) 69.6,80.35 ccw(c69.6,80.55) 69.8,80.55 69.8,80.75 cw(c69.9,80.75) 69.9,80.85 ccw(c69.9,80.95) 70,80.95
NetL1_2 on Top Layer "NETL1_2_L01_P000" (solid, pour order 0): 70.2,83.05 cw(c70.4,83.05) 70.4,83.25 71.2,83.25 cw(c71.2,83.05) 71.4,83.05 71.4,81.15 cw(c71.2,81.15) 71.2,80.95 71.1,80.95 ccw(c71.1,80.65) 70.8,80.65 70.8,80.55 cw(c70.6,80.55) 70.6,80.35 cw(c70.6,80.55) 70.4,80.55 70.4,80.75 ccw(c70.3,80.75) 70.3,80.85 cw(c70.3,80.95) 70.2,80.95
GND on Bottom Layer "GND_L02_P012" (solid, pour order 12): 49.4,83.38 cw(c50.695,83.38) 50.695,84.675 93.155,84.675 cw(c93.155,83.405) 94.425,83.405 94.425,54.945 cw(c93.155,54.945) 93.155,53.675 50.7,53.675 cw(c50.7,54.95) 49.425,54.95 49.425,80.975 ccw(c49.4,80.975) 49.4,81

## Silkscreen, mask and mechanical layers (free items; w line width, h text height)
Mechanical 1:
  lines w0.15: 49.425,54.945 ccw(c50.695,54.945) 50.695,53.675 93.155,53.675 ccw(c93.155,54.945) 94.425,54.945 ; 49.425,54.95 49.425,83.405 cw(c50.695,83.405) 50.695,84.675 71.925,84.675 93.155,84.675 cw(c93.155,83.405) 94.425,83.405 94.425,79.475 94.425,66.275 94.425,54.95

## Text inside footprints (layer, text, board x,y; h text height)
J3: Mechanical 13 "PCB EDGE" at 49.525,64.725 h0.41 r270